# EAGLE board BX31 IoT Board (EAGLE 7.7.0)
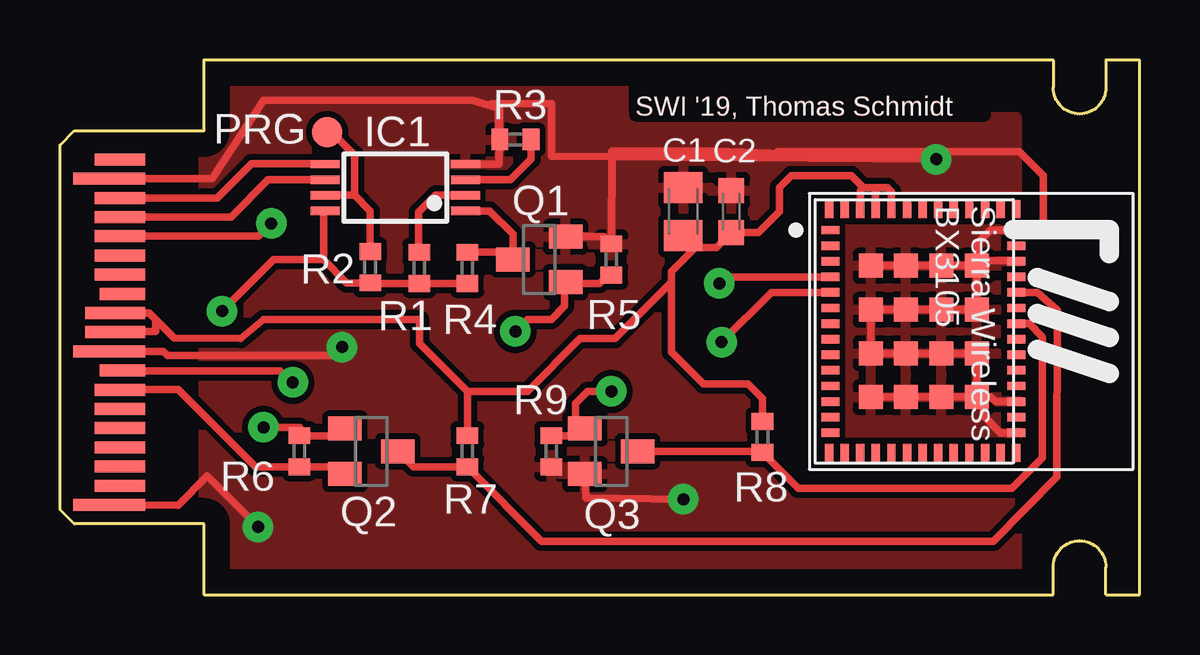
[diagram p0: board, top side]
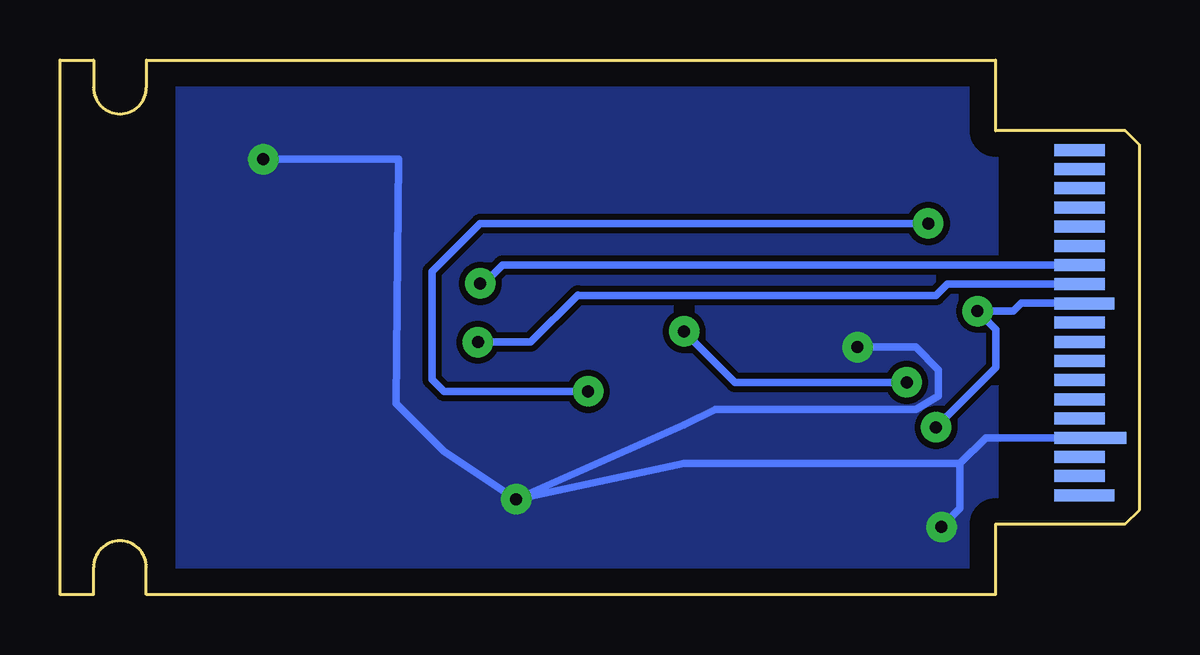
[diagram p1: board, bottom side, seen from below]

Size 45 x 22.3 mm. Coordinates in mm from the lower left corner, seen from the top.
Copper layers (1*16): Top 0.035mm / dielectric 1.5mm / Bottom 0.035mm
Design rules "IoT Card DR": minimum track width 10mil, minimum drill 24mil, track to track 10mil, track to pad 10mil, pad to pad 10mil, via to via 10mil, smd to smd 8mil, copper to edge 40mil, drill to drill 8mil, minimum pad ring 10mil, minimum via ring 8mil, stop-mask expansion 4mil, vias tented up to drill 0mil, thermal gap 10mil

## Footprints (pad centres in the part's own frame; a part is rotated, then mirrored left to right if it is on the bottom)
C0805K = smd 1.3 x 1.6: 1 -1,0; 2 1,0
C0603K = smd 1.05 x 1.08: 1 -0.875,0; 2 0.875,0
TSSOP8 = smd 0.35 x 1.2: 1 -0.975,-2.925; 2 -0.325,-2.925; 3 0.325,-2.925; 4 0.975,-2.925; 5 0.975,2.925; 6 0.325,2.925; 7 -0.325,2.925; 8 -0.975,2.925
BX3105 = smd 0.75 x 0.35: 1 0.875,9.975; 2 0.875,9.325; 3 0.875,8.675; 4 0.875,8.025; 5 0.875,7.375; 6 0.875,6.725; 7 0.875,6.075; 8 0.875,5.425; 9 0.875,4.775; 10 0.875,4.125; 11 0.875,3.475; 12 0.875,2.825; 13 0.875,2.175; 14 0.875,1.525; 28 8.625,1.525; 29 8.625,2.175; 30 8.625,2.825; 31 8.625,3.475; 32 8.625,4.125; 33 8.625,4.775; 34 8.625,5.425; 35 8.625,6.075; 36 8.625,6.725; 37 8.625,7.375; 38 8.625,8.025; 39 8.625,8.675; 40 8.625,9.325; 41 8.625,9.975 | smd 0.35 x 0.75: 15 0.825,0.675; 16 1.475,0.675; 17 2.125,0.675; 18 2.775,0.675; 19 3.425,0.675; 20 4.075,0.675; 21 4.725,0.675; 22 5.375,0.675; 23 6.025,0.675; 24 6.675,0.675; 25 7.325,0.675; 26 7.975,0.675; 27 8.625,0.675; 42 8.625,10.85; 43 7.975,10.85; 44 7.325,10.85; 45 6.675,10.85; 46 6.025,10.85; 47 5.375,10.85; 48 4.725,10.85; 49 4.075,10.85; 50 3.425,10.85; 51 2.775,10.85; 52 2.125,10.85; 53 1.475,10.85; 54 0.825,10.85 | smd 1 x 1: G1 2.562,8.488; G2 4.038,8.487; G3 5.513,8.487; G4 6.988,8.487; G5 2.563,6.662; G6 4.038,6.662; G7 5.513,6.662; G8 6.988,6.662; G9 2.563,4.837; G10 4.038,4.837; G11 5.513,4.837; G12 6.988,4.837; G13 2.563,3.012; G14 4.038,3.012; G15 5.513,3.012; G16 6.988,3.012
B1,27 = smd 1.27 x 1.27: TP 0,0
SOT23 = smd 1 x 1.4: 1 -0.95,-1.1; 2 0.95,-1.1; 3 0,1.1
R0402 = smd 0.7 x 0.9: 1 -0.65,0; 2 0.65,0
IOT = smd 2.5 x 0.5 bottom: 1 2.3,4.15; 11 2.3,12.15 | smd 2.1 x 0.5 bottom: 2 2.5,4.95; 3 2.5,5.75; 5 2.5,7.35; 6 2.5,8.15; 7 2.5,8.95; 8 2.5,9.75; 9 2.5,10.55; 10 2.5,11.35; 12 2.5,12.95; 13 2.5,13.75; 14 2.5,14.55; 15 2.5,15.35; 16 2.5,16.15; 17 2.5,16.95; 18 2.5,17.75; 19 2.5,18.55 | smd 3 x 0.5 bottom: 4 2.05,6.55 | smd 2.1 x 0.5: 20 2.5,18.15; 22 2.5,16.55; 23 2.5,15.75; 24 2.5,14.95; 25 2.5,14.15; 26 2.5,13.35; 32 2.5,8.55; 33 2.5,7.75; 34 2.5,6.95; 35 2.5,6.15; 36 2.5,5.35; 37 2.5,4.55 | smd 3 x 0.5: 21 2.05,17.35; 30 2.05,10.15; 38 2.05,3.75 | smd 1.9 x 0.5: 27 2.6,12.55; 31 2.6,9.35 | smd 2.5 x 0.5: 28 2.3,11.75; 29 2.3,10.95

## Placement (x,y rotation side)
C1  22u  [C0805K]  25.98,15.98 90 top
C2  [C0603K]  27.98,15.98 90 top
IC1  CAT24C32 YI-GT3  [TSSOP8]  13.98,16.98 90 top
MODULE1  BX3105  [BX3105]  31.23,5.23 0 top
PRG  TPSB1,27  [B1,27]  11.13,19.28 0 top
Q1  BSS138  [SOT23]  19.98,13.98 90 top
Q2  BSS138  [SOT23]  12.98,5.98 270 top
Q3  BSS138  [SOT23]  22.98,5.98 270 top
R1  10k  [R0402]  14.98,13.63 270 top
R2  10k  [R0402]  12.93,13.66 270 top
R3  10k  [R0402]  18.98,18.98 0 top
R4  10k  [R0402]  16.98,13.63 270 top
R5  10k  [R0402]  22.98,13.98 270 top
R6  10k  [R0402]  9.98,5.98 90 top
R7  10k  [R0402]  16.98,5.98 90 top
R8  10k  [R0402]  29.28,6.58 90 top
R9  10k  [R0402]  20.48,5.98 270 top
U$1  IOT  [IOT]  0,0 0 top

## Library data of the parts
C1 C2 R1-R9 = rcl
IC1 = microchip; MPN: CAT24C64YI-GT3; OC_FARNELL: 1718133; OC_NEWARK: 08R5418
MODULE1 = Sierra BX310x
PRG = testpad
Q1-Q3 = transistor-small-signal
U$1 = IoT Card

## Nets
BX-RX_IOT-TX: MODULE1.5 U$1.12
BX-TX_IOT-RX: MODULE1.4 U$1.13
EEPROM_A0: IC1.1 Q1.3 R4.1
EEPROM_A1: IC1.2 R1.1
EEPROM_A2: IC1.3 R3.2
EEPROM_WP: IC1.7 PRG.TP R2.1
ENABLE: MODULE1.37 Q2.3 R7.1
FW_UPDATE: MODULE1.35 Q3.3 R8.1
GND: C1.2 C2.2 IC1.4 MODULE1.28 MODULE1.30 MODULE1.39 MODULE1.41 MODULE1.G1 MODULE1.G2 MODULE1.G3 MODULE1.G4 MODULE1.G5 MODULE1.G6 MODULE1.G7 MODULE1.G8 MODULE1.G9 MODULE1.G10 MODULE1.G11 MODULE1.G12 MODULE1.G13 MODULE1.G14 MODULE1.G15 MODULE1.G16 Q1.2 Q3.2 R3.1 R5.1 R9.2 U$1.4 U$1.21 U$1.30 U$1.38
GPIO_1_1V8: Q3.1 R9.1 U$1.24
I2C_SCL: IC1.6 U$1.23
I2C_SDA: IC1.5 U$1.22
N_CARD_DETECT: Q1.1 R5.2 U$1.31
N_RESET: Q2.2 R6.1 U$1.32
VCC_1V8: IC1.8 Q2.1 R1.2 R2.2 R4.2 R6.2 U$1.11
VCC_3V3: C1.1 C2.1 MODULE1.50 MODULE1.51 MODULE1.52 R7.2 R8.2 U$1.28 U$1.29
VCC_5V5: U$1.1
VDD_SDIO: MODULE1.33

## Tracks (layer width: path | path; a pad name or v marks a point on that pad's centre or on a via)
BX-RX_IOT-TX  (via drill 0.5 pad 1.27)
  Top 0.305: MODULE1.5 29.66,12.61 v27.58,10.53
  Bottom 0.305: v27.58,10.53 25.38,10.53 23.41,12.51 23.38,12.48 8.48,12.48 8.01,12.96 6.01,12.96 5.95,12.95 U$1.12
BX-TX_IOT-RX  (via drill 0.5 pad 1.27)
  Top 0.305: MODULE1.4 27.75,13.26 v27.48,12.98
  Bottom 0.305: v27.48,12.98 27.33,12.98 26.55,13.76 U$1.13
EEPROM_A0
  Top 0.305: IC1.1 17.91,16 18.88,15.03 Q1.3 18.58,14.28 R4.1
EEPROM_A1
  Top 0.305: IC1.2 15.66,16.66 14.96,15.96 14.96,14.3 R1.1
EEPROM_A2
  Top 0.305: R3.2 19.63,18.16 18.78,17.3 IC1.3
EEPROM_WP
  Top 0.305: IC1.7 12.28,16.66 | 12.28,16.66 12.93,16 R2.1 | PRG.TP 11.33,19.28 12.28,18.33 12.28,16.66
ENABLE
  Top 0.305: MODULE1.37 40.73,12.61 41.58,11.88 41.55,4.91 38.9,2.23 20.08,2.23 R7.1 14.73,5.33 Q2.3
FW_UPDATE
  Top 0.305: MODULE1.35 40.4,11.3 40.95,10.76 40.95,5.71 39.68,4.43 30.78,4.43 R8.1 28.93,5.98 Q3.3
GND  (via drill 0.5 pad 1.27)
  Top 0.305: IC1.4 18.3,17.96 R3.1 | U$1.21 6.35,17.35 8.48,20.63 17.18,20.63 18.28,20.28 18.28,19.13 R3.1 | Q1.2 22.68,14.93 R5.1 23,18.5 27.36,18.5 v36.53,18.16 | 18.33,20.48 20.48,20.48 20.48,18.28 v36.53,18.16 | 17.98,20.48 18.33,20.48 | 18.33,20.48 R3.1 | MODULE1.G1 35.25,13.73 MODULE1.G2 MODULE1.G3 MODULE1.G4 | MODULE1.G4 MODULE1.G8 MODULE1.G7 MODULE1.G6 MODULE1.G5 MODULE1.G9 MODULE1.G10 MODULE1.G11 MODULE1.G12 MODULE1.G16 | MODULE1.G16 MODULE1.G15 MODULE1.G14 MODULE1.G13 | MODULE1.G16 38.79,8.24 38.98,8.05 MODULE1.30 | MODULE1.28 39.2,6.76 38.48,7.48 38.48,7.98 MODULE1.G16 | MODULE1.G4 38.34,13.72 38.55,13.93 39.83,13.93 MODULE1.39 | MODULE1.G4 38.25,13.75 38.25,14.68 38.78,15.21 MODULE1.41 40.7,15.21 40.98,15.48 40.98,17.48 39.98,18.48 29.93,18.48 v36.53,18.16 | Q3.2 21.93,4.03 v25.98,3.98 | U$1.38 4.93,3.73 6.13,4.96 v8.26,2.83 | U$1.30 4.31,10.15 4.48,9.98 11.41,9.98 v11.76,10.33
  Bottom 0.305: v25.98,3.98 28.98,5.98 30.98,7.98 30.88,18.16 v36.53,18.16 | U$1.4 6.41,6.55 7.48,5.48 | 7.48,5.48 18.98,5.48 v25.98,3.98 | 7.48,5.48 7.48,3.6 v8.26,2.83 | v11.76,10.33 9.33,10.33 8.38,9.38 8.38,8.28 9.33,7.73 17.68,7.73 18.98,7.08 v25.98,3.98
  pour Top: 5.98,22.48 23.48,22.48 23.48,19.93 39.88,19.93 39.88,-0.07 5.98,-0.02
  pour Bottom: 6.08,22.33 39.98,22.33 39.98,-0.02 6.08,-0.02
GPIO_1_1V8  (via drill 0.5 pad 1.27)
  Top 0.305: U$1.24 8.28,14.95 v8.8,15.48 | v22.98,8.48 21.98,8.48 21.48,7.98 21.48,7.33 Q3.1 21.58,6.63 R9.1
  Bottom 0.305: v8.8,15.48 27.48,15.48 29.48,13.48 29.48,8.98 28.98,8.48 v22.98,8.48
I2C_SCL
  Top 0.305: U$1.23 7.12,15.75 8.68,17.3 IC1.6
I2C_SDA
  Top 0.305: U$1.22 6.55,16.55 7.98,17.98 11.03,17.98 IC1.5
N_CARD_DETECT  (via drill 0.5 pad 1.27)
  Top 0.305: R5.2 22.83,13.33 22.48,12.98 21.13,12.98 Q1.1 21.03,13.03 21.03,12.03 20.48,11.48 19.48,11.48 v18.98,10.98 | U$1.31 2.62,9.33 9.18,9.33 v9.71,8.86
  Bottom 0.305: v18.98,10.98 16.86,8.86 v9.71,8.86
N_RESET
  Top 0.305: Q2.2 11.58,5.33 R6.1 8.16,5.33 4.93,8.55 U$1.32
VCC_1V8  (via drill 0.5 pad 1.27)
  Top 0.305: R4.2 R1.2 12.96,12.98 R2.2 11.96,13.01 10.98,13.98 | 10.98,13.98 10.98,15.93 IC1.8 | v6.76,11.83 8.91,13.98 10.98,13.98 | Q2.1 11.58,6.63 R6.2 9.98,6.98 v8.48,6.98
  Bottom 0.305: U$1.11 4.93,12.16 5.26,11.83 v6.76,11.83 5.98,11.05 5.98,9.48 v8.48,6.98
VCC_3V3
  Top 0.305: U$1.28 3.71,11.75 3.98,11.48 | 3.98,11.48 3.98,10.98 2.33,10.98 U$1.29 | MODULE1.52 33.35,16.86 33.48,16.98 | 33.48,16.98 33.98,16.98 | 33.98,16.98 34.48,16.98 34.65,16.8 MODULE1.50 | MODULE1.51 33.98,16.11 33.98,16.98 | 33.48,16.98 32.98,17.48 30.48,17.48 29.98,16.98 29.98,15.98 29.11,15.11 C2.1 27.36,14.48 26.48,14.48 | 3.98,11.48 4.76,10.71 7.53,10.68 8.48,11.48 14.98,11.48 14.98,10.48 16.98,8.48 | R7.2 16.98,8.48 | 26.48,14.48 C1.1 | 26.48,14.48 25.48,13.48 25.48,13.03 | 16.98,8.48 19.48,8.48 21.68,10.68 23.13,10.68 25.48,13.03 | R8.2 29.28,8.18 28.68,8.78 26.83,8.78 25.48,10.13 25.48,13.03

## Text on the board
Top: SWI '19, Thomas Schmidt
tNames: SWI '19, Thomas Schmidt